# EAGLE board PRINT BOARD (EAGLE 7.2.0)
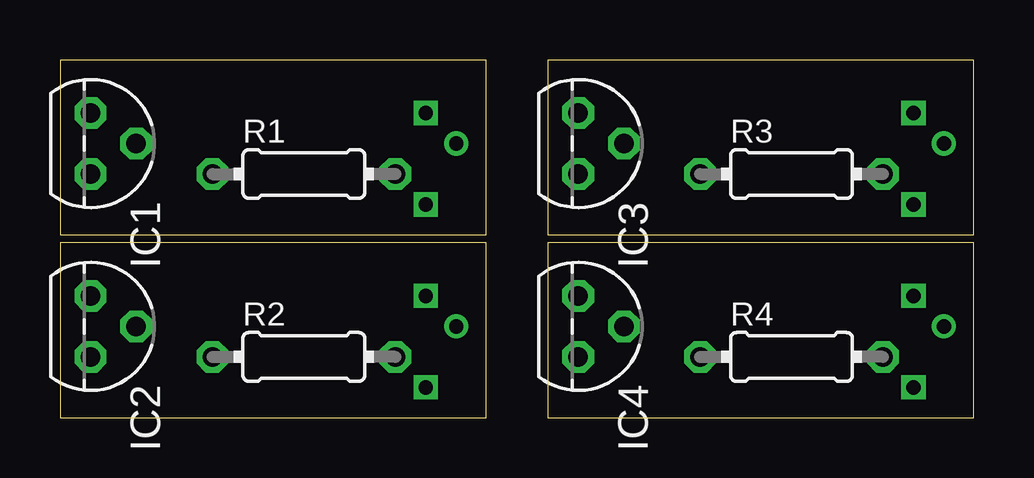
[diagram p0: board, top side]
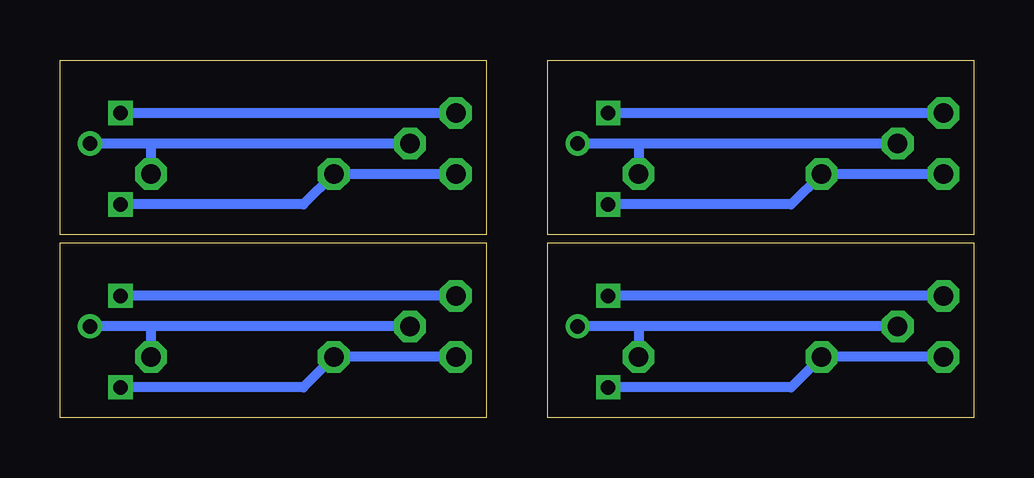
[diagram p1: board, bottom side, seen from below]

Size 38.08 x 14.91 mm. Coordinates in mm from the lower left corner, seen from the top.
Outline: 0,7.62 17.76,7.62 17.76,14.91 0,14.91 0,7.62
Outline: 0,0 17.76,0 17.76,7.29 0,7.29 0,0
Outline: 20.32,7.62 38.08,7.62 38.08,14.91 20.32,14.91 20.32,7.62
Outline: 20.32,0 38.08,0 38.08,7.29 20.32,7.29 20.32,0
Copper layers (1*16): Top 0.035mm / dielectric 1.5mm / Bottom 0.035mm
Design rules "default": minimum track width 10mil, minimum drill 24mil, track to track 8mil, track to pad 8mil, pad to pad 8mil, via to via 8mil, smd to smd 8mil, copper to edge 40mil, drill to drill 8mil, minimum pad ring 10mil, minimum via ring 8mil, stop-mask expansion 4mil, vias tented up to drill 0mil, thermal gap 10mil

## Footprints (pad centres in the part's own frame; a part is rotated, then mirrored left to right if it is on the bottom)
TO92 = drill 0.813 octagon: 1 -1.27,0; 2 0,1.905; 3 1.27,0
0204/7 = drill 0.813 octagon: 1 -3.81,0; 2 3.81,0

## Placement (x,y rotation side)
IC1  LM35CZ  [TO92]  1.27,11.43 270 top
IC2  LM35CZ  [TO92]  1.27,3.81 270 top
IC3  LM35CZ  [TO92]  21.59,11.43 270 top
IC4  LM35CZ  [TO92]  21.59,3.81 270 top
R1  100k  [0204/7]  10.16,10.16 0 top
R2  100k  [0204/7]  10.16,2.54 0 top
R3  100k  [0204/7]  30.48,10.16 0 top
R4  100k  [0204/7]  30.48,2.54 0 top

## Library data of the parts
IC1-IC4 = lm35
R1-R4 = rcl

## Nets
N$1: IC1.1
N$2: IC1.3 R1.1
N$3: IC1.2 R1.2
N$4: IC2.1
N$5: IC2.3 R2.1
N$6: IC2.2 R2.2
N$7: IC3.1
N$8: IC3.3 R3.1
N$9: IC3.2 R3.2
N$10: IC4.1
N$11: IC4.3 R4.1
N$12: IC4.2 R4.2

## Tracks (layer width: path | path; a pad name or v marks a point on that pad's centre or on a via)
N$1  (via drill 0.6)
  Bottom 0.406: IC1.1 v15.24,12.7
N$2  (via drill 0.6)
  Bottom 0.406: IC1.3 R1.1 7.62,8.89 v15.24,8.89
N$3  (via drill 0.6)
  Bottom 0.406: R1.2 13.97,11.43 IC1.2 v16.51,11.43
N$4  (via drill 0.6)
  Bottom 0.406: IC2.1 v15.24,5.08
N$5  (via drill 0.6)
  Bottom 0.406: IC2.3 R2.1 7.62,1.27 v15.24,1.27
N$6  (via drill 0.6)
  Bottom 0.406: R2.2 13.97,3.81 IC2.2 v16.51,3.81
N$7  (via drill 0.6)
  Bottom 0.406: IC3.1 v35.56,12.7
N$8  (via drill 0.6)
  Bottom 0.406: IC3.3 R3.1 27.94,8.89 v35.56,8.89
N$9  (via drill 0.6)
  Bottom 0.406: R3.2 34.29,11.43 IC3.2 v36.83,11.43
N$10  (via drill 0.6)
  Bottom 0.406: IC4.1 v35.56,5.08
N$11  (via drill 0.6)
  Bottom 0.406: IC4.3 R4.1 27.94,1.27 v35.56,1.27
N$12  (via drill 0.6)
  Bottom 0.406: R4.2 34.29,3.81 IC4.2 v36.83,3.81